# Altium PCB casio_final.PcbDoc
Units mil, origin at the board's own origin, x right, y up, seen from the top; angles counter-clockwise.
Board outline 3690 x 3925 mil, 2 copper layers (Top Layer, Bottom Layer); 46 components, 25 nets, 186 pads, 2 vias.
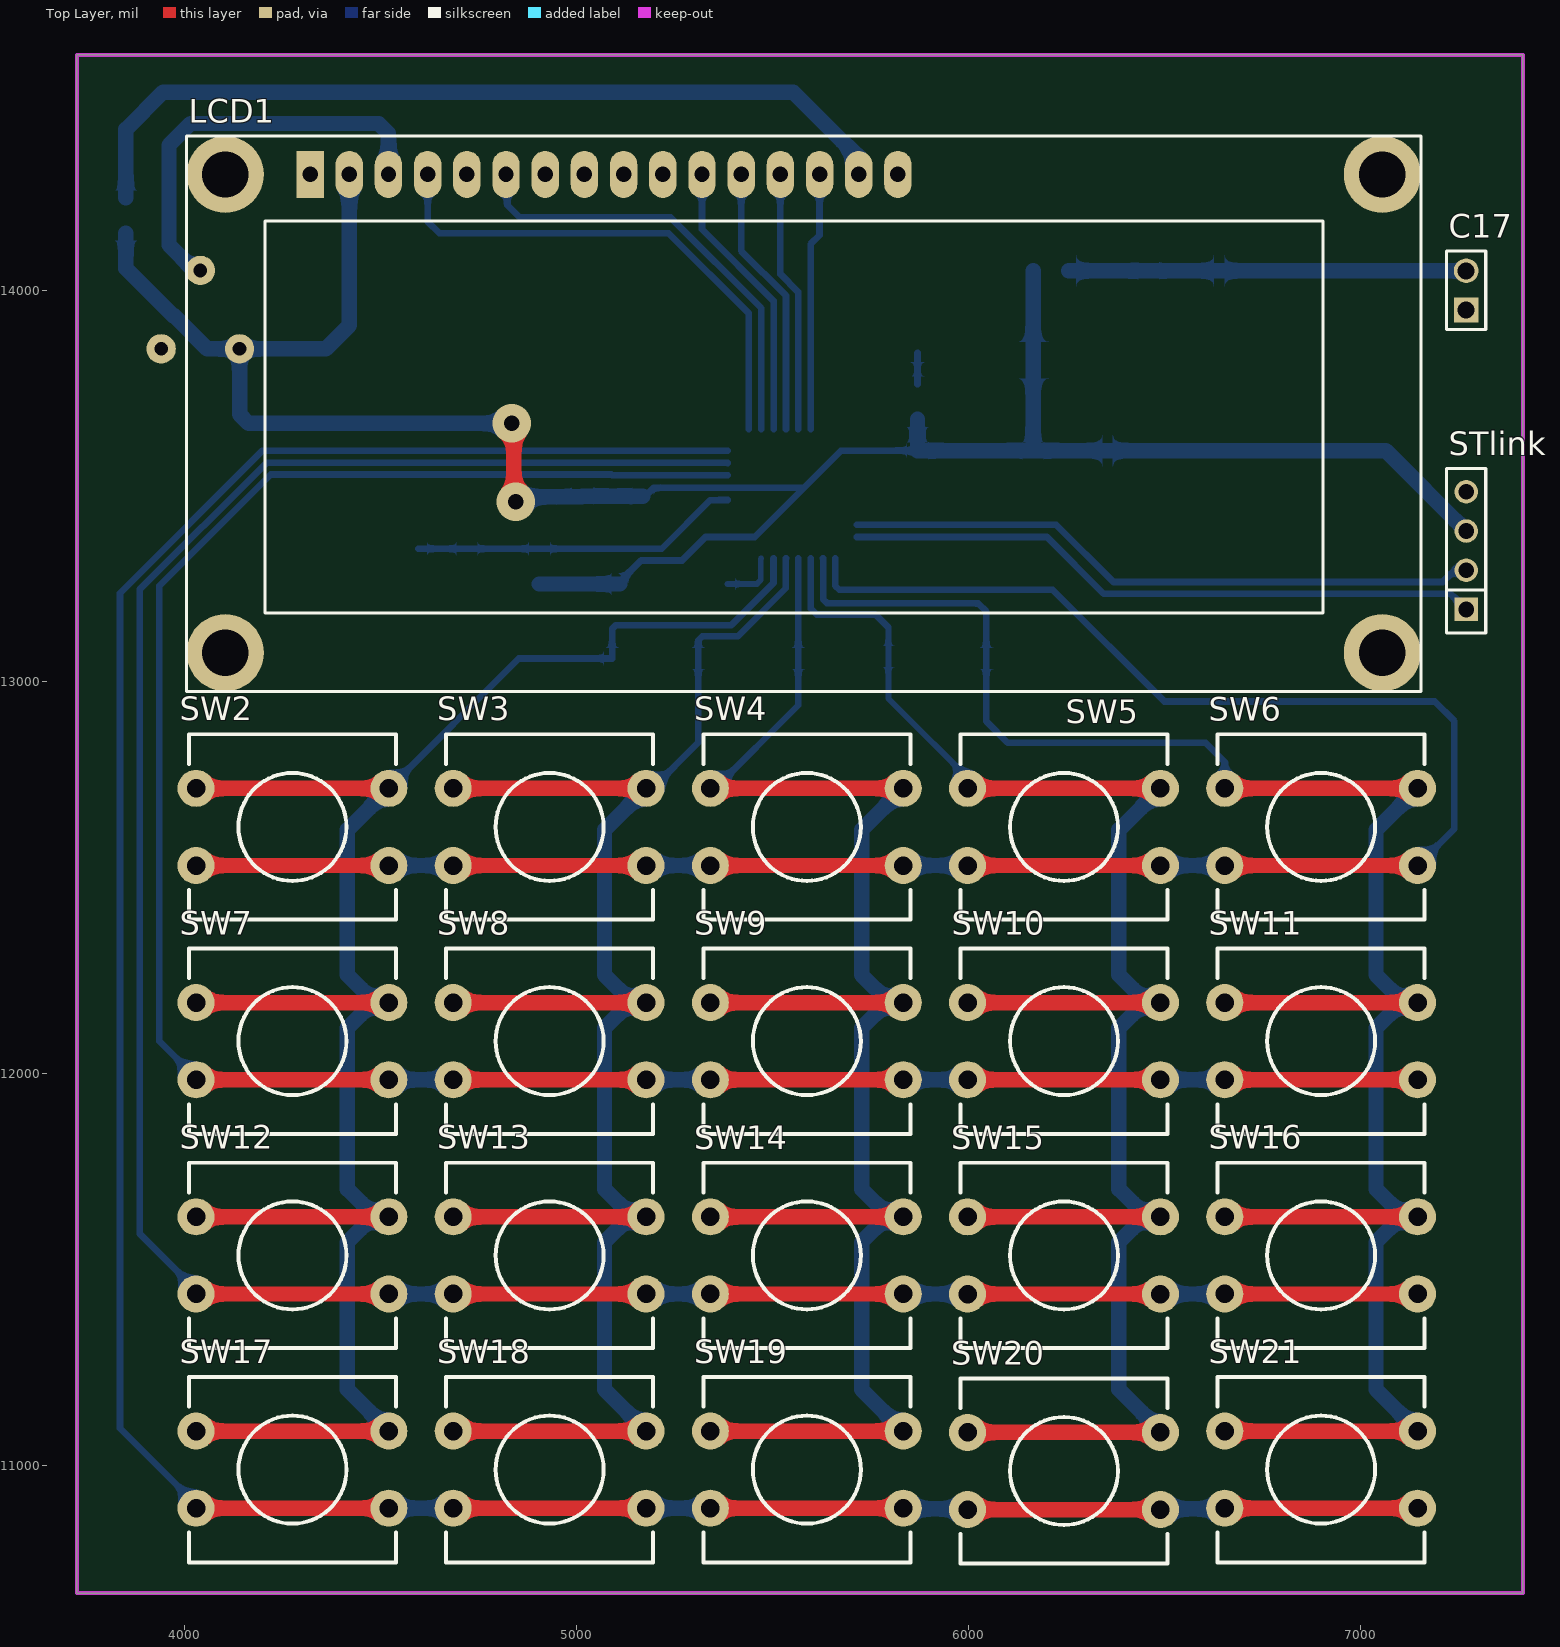
[diagram p0: Top Layer view]
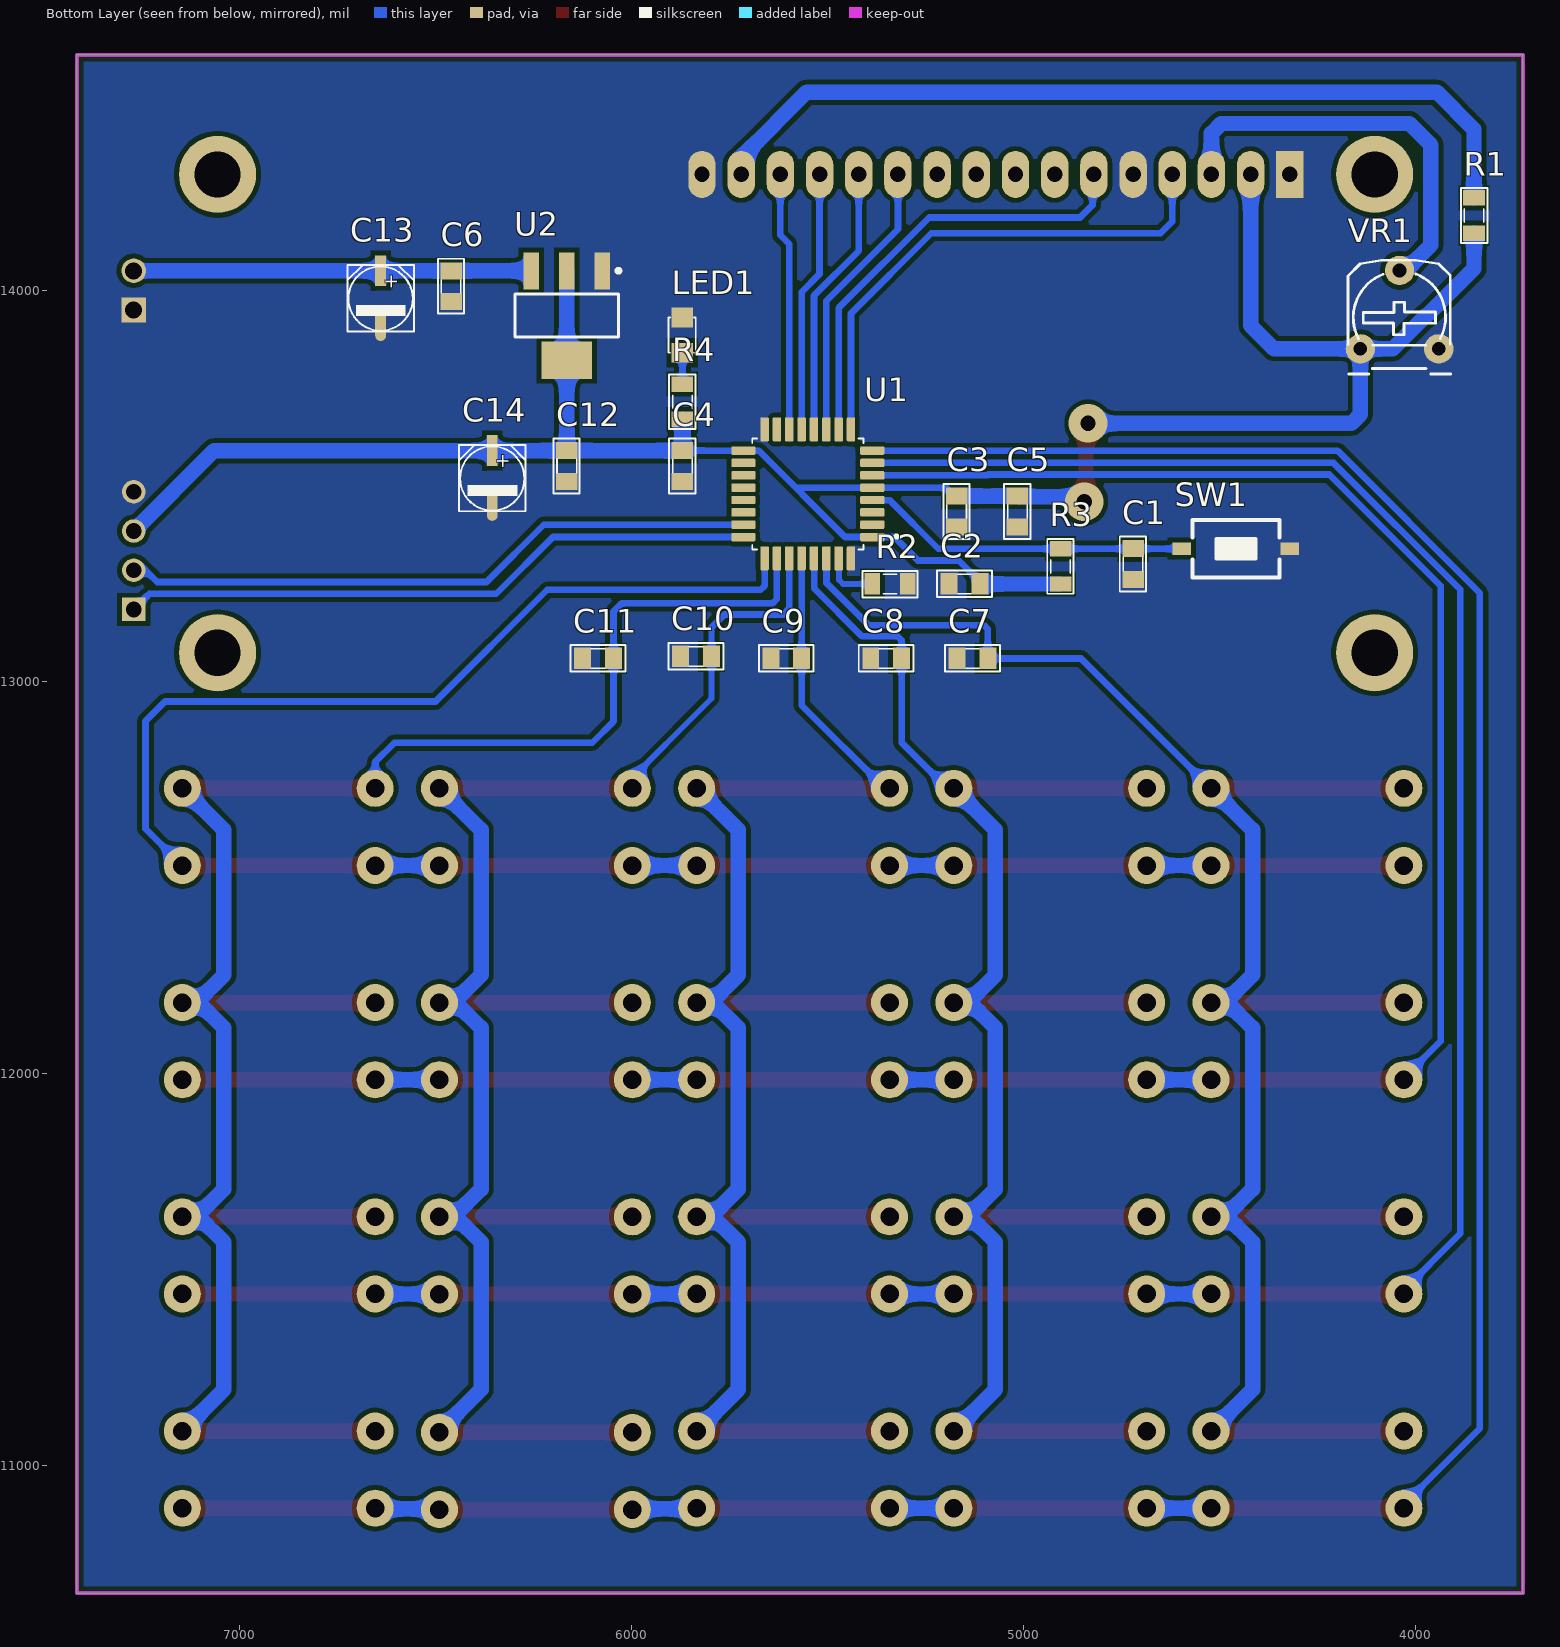
[diagram p1: Bottom Layer view, seen from below]
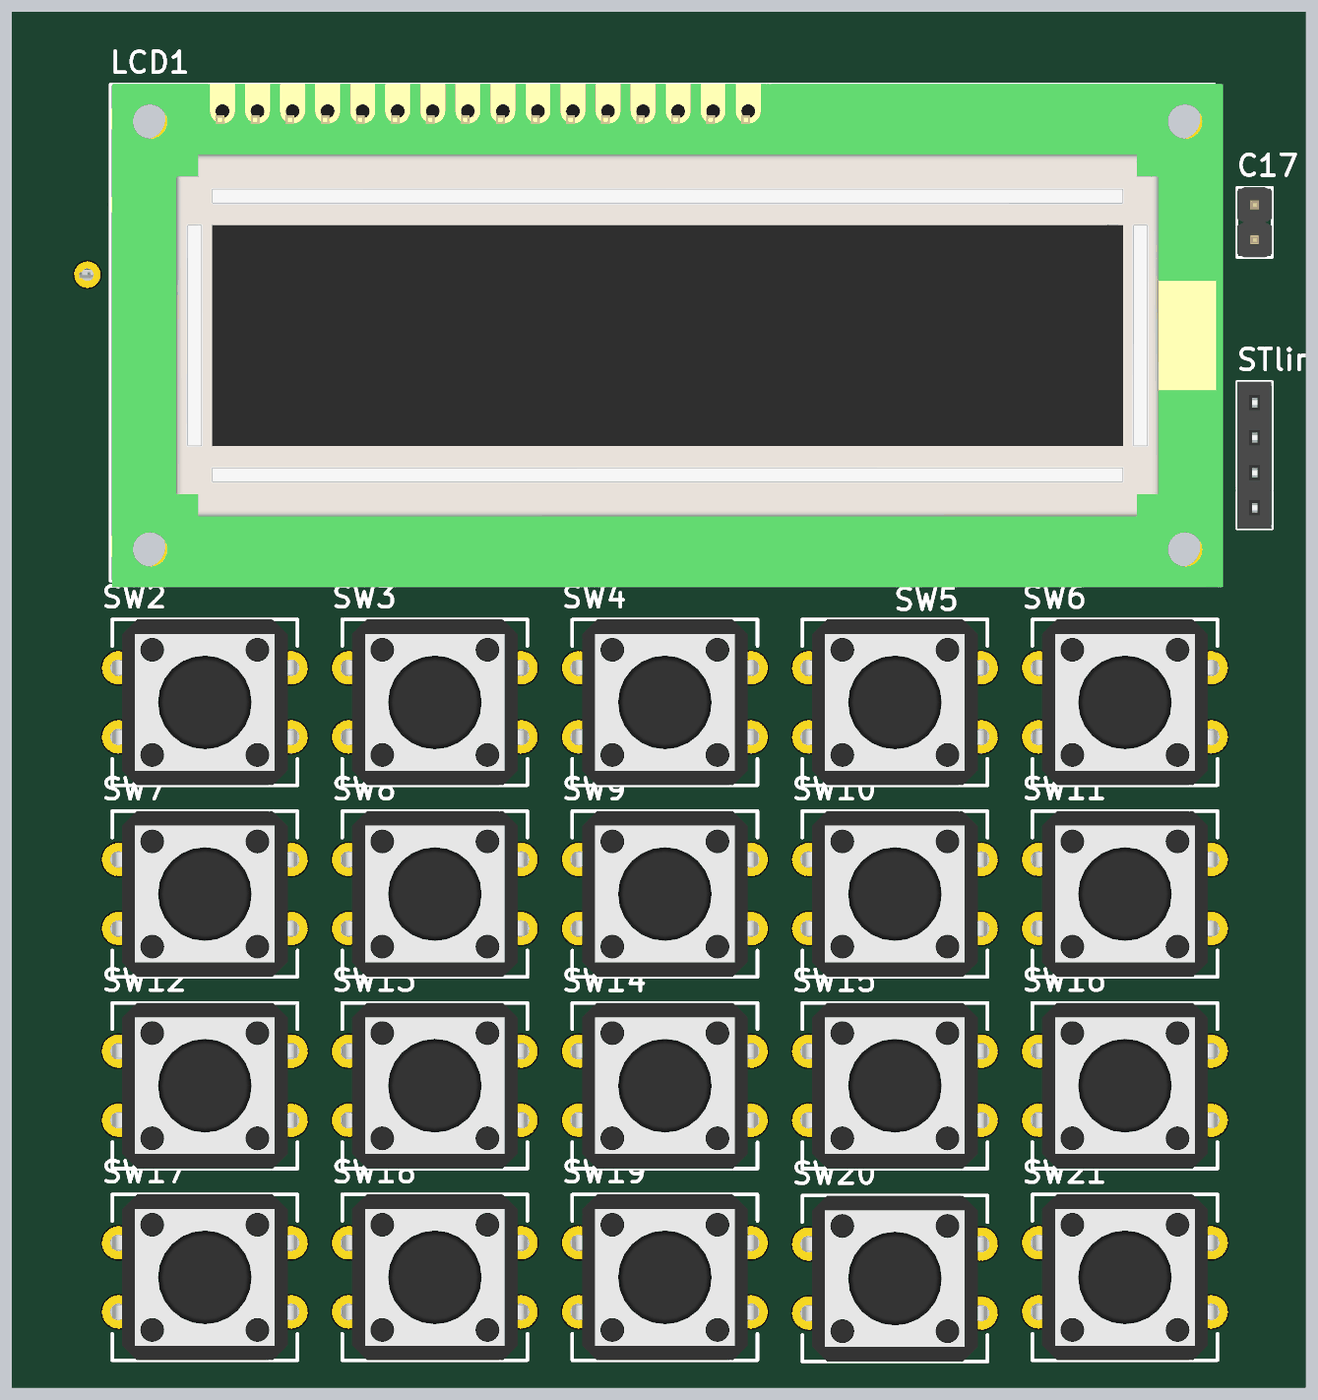
[diagram p2: 3D render of the assembled board from above, using the file's embedded part models]
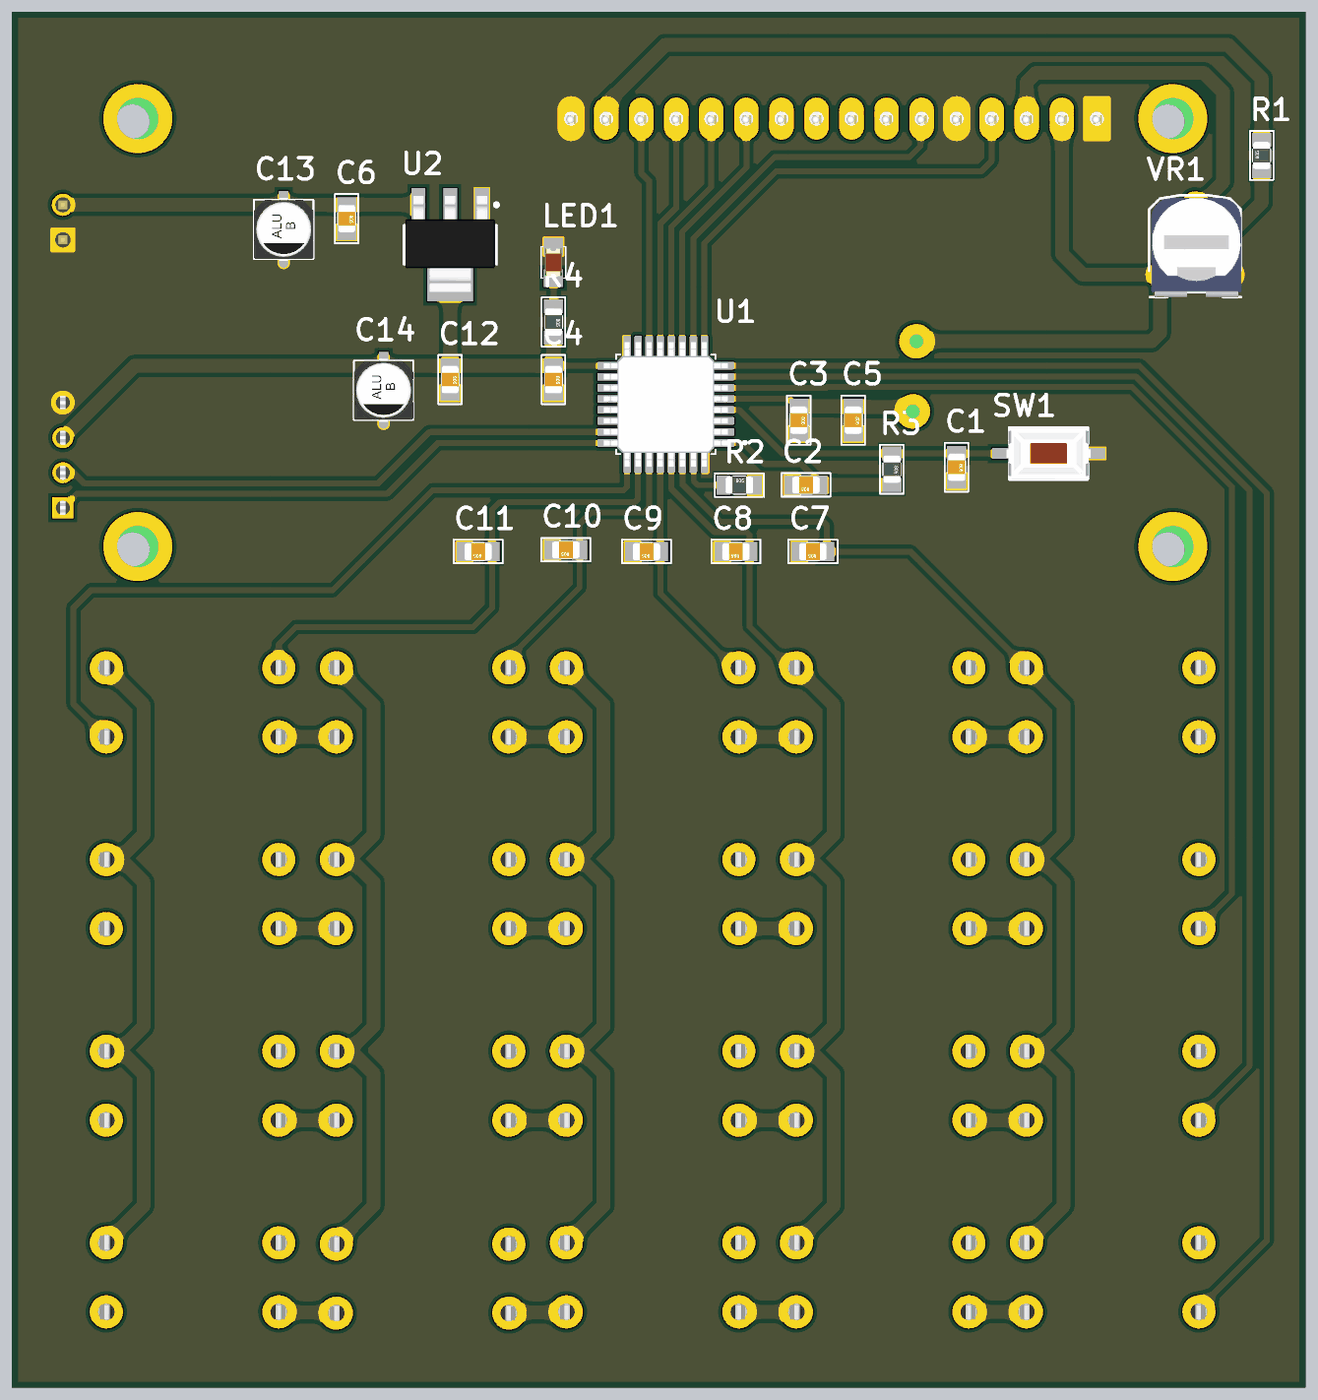
[diagram p3: 3D render of the assembled board from below, using the file's embedded part models]

## Layer stack, top to bottom
Top Solder: solder mask 0.4, Solder Resist, Dk 3.5
Top Layer: signal copper 1.4
Dielectric 1: dielectric 12.6, FR-4, Dk 4.8
Bottom Layer: signal copper 1.4
Bottom Solder: solder mask 0.4, Solder Resist, Dk 3.5

## Board outline
3725,10675 3725,14600 7415,14600 7415,10675

## Design rules (kind name [scope] priority, off if disabled: settings)
Clearance [All] p1: gap=11.81 ignorepadtopadclearanceinfootprint=TRUE
HoleSize [All] p1 off: absolutevalues=TRUE maxlimit=100 minlimit=1 maxpercent=80.000 minpercent=20.000
HoleToHoleClearance [All] p1 off: gap=10 allowstackedmicrovias=TRUE
LayerPairs [All] p1 off: enforce=TRUE
MinimumSolderMaskSliver [All] p1 off: minsoldermaskwidth=10
NetAntennae [All] p1 off: netantennaetolerance=0
PolygonConnect [All] p1: connectstyle=Direct reliefconductorwidth=10 reliefentries=4 polygonreliefangle="90 Angle" airgapwidth=10
RoutingVias [All] p1: holewidth=28 width=50 viastyle="Through Hole" minholewidth=28 minwidth=50 maxholewidth=28 maxwidth=50
SilkToSilkClearance [All] p1 off: silktosilkclearance=10
SilkToSolderMaskClearance [IsPad] p1 off: minsilkscreentomaskgap=10 clearancetoexposedcopper=TRUE
SolderMaskExpansion [All] p1: expansion=4 istentingtop=FALSE
SupplyNets "Schematic Supply Nets_2" [InNet('+6')] p1: voltage=0.000
SupplyNets "Schematic Supply Nets_1" [InNet('GND')] p2: voltage=0.000
SupplyNets "Schematic Supply Nets" [InNet('+3.3')] p3: voltage=0.000
Width [All] p1: maxlimit=100 minlimit=10 preferedwidth=15
23 further rules are at their usual default settings.

## Components (designator, comment, footprint, x,y, rotation, side; value= is the part's Value field where it differs from the comment)
C1 "0.1u" CN-SMD-0805 4720.01,13300.64 r270 bottom value=33pF
C2 "100n" CN-SMD-0805 5150,13250.01 r0 bottom value=33pF
C3 "0.1u" CN-SMD-0805 5170,13435 r270 bottom value=33pF
C4 "100n" CN-SMD-0805 5870,13550.87 r270 bottom value=33pF
C5 "4.7u" CN-SMD-0805 5015,13435 r270 bottom value=33pF
C6 "0.1u" CN-SMD-0805 6460,14009.81 r270 bottom value=33pF
C7 "0.1u" CN-SMD-0805 5130,13060 r0 bottom value=33pF
C8 "0.1u" CN-SMD-0805 5350,13060 r0 bottom value=33pF
C9 "0.1u" CN-SMD-0805 5605,13060 r0 bottom value=33pF
C10 "0.1u" CN-SMD-0805 5835,13065 r0 bottom value=33pF
C11 "0.1u" CN-SMD-0805 6085,13060 r0 bottom value=33pF
C12 "0.1u" CN-SMD-0805 6165.01,13550.87 r270 bottom value=33pF
C13 "10u" CAP-ALU-SMD-5.5x5.5 6640,13979.17 r270 bottom
C14 "10u" CAP-ALU-SMD-5.5x5.5 6355,13520.24 r270 bottom
C17 "JP2" JP2-D1T 7270,13949.17 r90 top
LCD1 "LCD 16x2A" LCD16X2 4320,14295 r0 top locked value=LCD16x2A
LED1 "LED" LED-0805-Red 5870.5,13840 r90 bottom value="LED 3 - 5 ly 2 Colour"
R1 "220" RES-SMD-0805 3850,14190 r90 bottom
R2 "10k" RES-SMD-0805 5340,13250 r180 bottom
R3 "10k" RES-SMD-0805 4905,13295 r270 bottom
R4 "1k" RES-SMD-0805 5870,13715 r270 bottom
STlink "JP4" JP4-C1T 7270,13185 r90 top
SW1 "SW" SW1-SMD 4457.8,13340 r0 bottom value="SW chip 2 pin"
SW2 "SW" SW1-DIP-12x12x8-Black 4275,12630 r180 top value="SW chip 2 pin"
SW3 "SW" SW1-DIP-12x12x8-Black 4931.25,12630 r180 top value="SW chip 2 pin"
SW4 "SW" SW1-DIP-12x12x8-Black 5587.5,12630 r180 top value="SW chip 2 pin"
SW5 "SW" SW1-DIP-12x12x8-Black 6243.75,12630 r180 top value="SW chip 2 pin"
SW6 "SW" SW1-DIP-12x12x8-Black 6900,12630 r180 top value="SW chip 2 pin"
SW7 "SW" SW1-DIP-12x12x8-Black 4275,12083.33 r180 top value="SW chip 2 pin"
SW8 "SW" SW1-DIP-12x12x8-Black 4931.25,12083.33 r180 top value="SW chip 2 pin"
SW9 "SW" SW1-DIP-12x12x8-Black 5587.5,12083.33 r180 top value="SW chip 2 pin"
SW10 "SW" SW1-DIP-12x12x8-Black 6243.75,12083.33 r180 top value="SW chip 2 pin"
SW11 "SW" SW1-DIP-12x12x8-Black 6900,12083.33 r180 top value="SW chip 2 pin"
SW12 "SW" SW1-DIP-12x12x8-Black 4275,11536.67 r180 top value="SW chip 2 pin"
SW13 "SW" SW1-DIP-12x12x8-Black 4931.25,11536.67 r180 top value="SW chip 2 pin"
SW14 "SW" SW1-DIP-12x12x8-Black 5587.5,11536.67 r180 top value="SW chip 2 pin"
SW15 "SW" SW1-DIP-12x12x8-Black 6243.75,11536.57 r180 top value="SW chip 2 pin"
SW16 "SW" SW1-DIP-12x12x8-Black 6900,11536.67 r180 top value="SW chip 2 pin"
SW17 "SW" SW1-DIP-12x12x8-Black 4275,10990 r180 top value="SW chip 2 pin"
SW18 "SW" SW1-DIP-12x12x8-Black 4931.25,10990 r180 top value="SW chip 2 pin"
SW19 "SW" SW1-DIP-12x12x8-Black 5587.5,10990 r180 top value="SW chip 2 pin"
SW20 "SW" SW1-DIP-12x12x8-Black 6243.75,10986.57 r180 top value="SW chip 2 pin"
SW21 "SW" SW1-DIP-12x12x8-Black 6900,10990 r180 top value="SW chip 2 pin"
U1 "STM32F030K6T6" QFP80P900X900X160-32N 5550,13480 r0 bottom
U2 "LM1117-3.3V" SOT223 6165,13935 r0 bottom
VR1 "10k" VR-S2 4140,13850 r180 bottom value="Volume 50k"

## Footprints (in the part's own frame and the unit in brackets; to place one, negate y for a bottom-side part, rotate by r counter-clockwise, add the part's x,y. Pads: shape width x height; smd on the part's side, far side on the other; paste and mask are expansions set on the pad)
CAP-ALU-SMD-5.5x5.5 [mm]
  rect 2x0.7 smd: 1(-1.778,0)
  oval 2x0.7 smd: 2(1.778,0)
  silkscreen extent -2.15,-2.15 2.15,2.15, body extent -2.3,-2.15 2.3,2.15, height 5.4
CN-SMD-0805 [mil]
  rect 43.31x55 smd: 1(-39.36,0.01) 2(39.37,0.01)
  silkscreen extent -70,-34 70,33, body extent -39,-25 39,25, height 31
JP2-D1T [mm] "2 pins, 1 row, straight, gold plating"
  rect 1.6x1.6 hole 1.1: 1(0,0)
  round 1.6 hole 1.1: 2(2.54,0)
  silkscreen extent -1.27,-1.27 3.81,1.27, body extent -1.27,-1.27 3.81,1.27, height 8.54
JP4-C1T [mm] "4 row, straight, gold plating"
  rect 1.52x1.52 hole 1.02: 1(0,0)
  round 1.52 hole 1.02: 2(2.54,0) 3(5.08,0) 4(7.62,0)
  silkscreen extent -1.52,-1.27 9.14,1.27, body extent -1.52,-1.25 9.14,1.25, height 8.51
LCD16X2 [mm] "LCD dipslay 16x2, 16 pin"
  rect 1.778x3.048 hole 1: 1(0,0)
  oval 1.778x3.048 hole 1: 2(2.54,0) 3(5.08,0) 4(7.62,0) 5(10.16,0) 6(12.7,0) 7(15.24,0) 8(17.78,0) 9(20.32,0) 10(22.86,0) 11(25.4,0) 12(27.94,0) 13(30.48,0) 14(33.02,0) 15(35.56,0) 16(38.1,0)
  round 5 hole 3: 17(-5.5,-31) 17(-5.5,0) 17(69.5,-31) 17(69.5,0)
  round 0 all layers, no hole: ""(-5.5,0)
  silkscreen extent -8,-33.5 72,2.5, body extent -7.87,-33.96 72.64,2.54, height 18.14
LED-0805-Red [mil]
  rect 50x55 smd: 1(0,0) 2(90,0)
  silkscreen extent 0,-35 90,35, body extent 5,-25 85,25, height 43
QFP80P900X900X160-32N [mm]
  rrect25% 1.56x0.55 smd: 1(-4.18,2.8) 2(-4.18,2) 3(-4.18,1.2) 4(-4.18,0.4) 5(-4.18,-0.4) 6(-4.18,-1.2) 7(-4.18,-2) 8(-4.18,-2.8) 17(4.18,-2.8) 18(4.18,-2) 19(4.18,-1.2) 20(4.18,-0.4) 21(4.18,0.4) 22(4.18,1.2) 23(4.18,2) 24(4.18,2.8)
  rrect25% 0.55x1.56 smd: 9(-2.8,-4.18) 10(-2,-4.18) 11(-1.2,-4.18) 12(-0.4,-4.18) 13(0.4,-4.18) 14(1.2,-4.18) 15(2,-4.18) 16(2.8,-4.18) 25(2.8,4.18) 26(2,4.18) 27(1.2,4.18) 28(0.4,4.18) 29(-0.4,4.18) 30(-1.2,4.18) 31(-2,4.18) 32(-2.8,4.18)
  silkscreen extent -5.84,-3.6 3.6,3.6, body extent -4.5,-4.5 4.5,4.5, height 1.73
RES-SMD-0805 [mil]
  rect 39.37x55 smd: 1(-45,0) 2(45,0)
  silkscreen extent -70,-34 70,33, body extent -39,-25 39,25, height 31
SOT223 [mm]
  rect 1x2.4 smd: 1(-2.3,-2.9) 2(0,-2.9) 3(2.3,-2.9)
  rect 3.3x2.4 smd: 4(0,2.9)
  silkscreen extent -3.47,-3.02 3.35,1.4, body extent -3.25,-3.56 3.25,3.4, height 1.68
SW1-DIP-12x12x8-Black [mm] "SW button 4pin, 12x12mm"
  round 2.4 hole 1.2: 1(-6.25,2.5) 1(6.25,2.5) 2(-6.25,-2.5) 2(6.25,-2.5)
  silkscreen extent -6.71,-6.01 6.71,6.01, body extent -6.71,-6.01 6.71,6.01, height 7.87
SW1-SMD [mm]
  rect 1.2x0.8 smd: 1(-3.5,0) 2(3.5,0)
  silkscreen extent -2.82,-1.85 2.82,1.85, body extent -3.05,-1.85 3.05,1.85, height 2.5
VR-S2 [mil] "Resistor Variable"
  round 75 hole 35: 1(0,0) 2(100,200) 3(200,0)
  silkscreen extent -31,-64 231,226, body extent -23,-64 232,219, height 299

## Part data
C1 C2 C3 C4 C5 C6 C7 C8 C9 C10 C11 C12: library part CN
C13 C14: library part CN-SMD, "Polarized Capacitor (Axial)", LatestRevisionDate=17-Jul-2002, LatestRevisionNote="Re-released for DXP Platform.", PackageReference=POLAR0.8, Published=8-Jun-2000, Publisher="Altium Limited"
C17: "WR-PHD 2.54 mm Angled Socket Header", Manufacturer="W¨¹rth Elektronik eiSos GmbH", partNo=613002143121, ComponentLink1 Description=Manufacturer, ComponentLink1URL=http://www.we-online.com, ComponentLink2 Description=Datasheet, ComponentLink2URL=http://katalog.we-online.de/em/datasheet/6130xx143121.pdf, Created by="Karrer Zheng", Created Date="29 March 2013", NoPins=02
LCD1: library part LCD16x2A, "LCD dipslay 16 char, 2 line"
LED1: library part "LED SMD"
R1 R2 R3 R4: library part Res-SMD, "Resistor", Manufacturer="Generic Components", Class=Passive, Published=08/06/2000, Publisher="Altium Hobart Technology Centre"
STlink: "WR-PHD 2.54 mm Angled Socket Header", Manufacturer="W¨¹rth Elektronik eiSos GmbH", partNo=613004143121, ComponentLink1 Description=Manufacturer, ComponentLink1URL=http://www.we-online.com, ComponentLink2 Description=Datasheet, ComponentLink2URL=http://katalog.we-online.de/em/datasheet/6130xx143121.pdf, Created by="Karrer Zheng", Created Date="29 March 2013", NoPins=04
SW1 SW2 SW3 SW4 SW5 SW6 SW7 SW8 SW9 SW10 SW11 SW12 SW13 SW14 SW15 SW16 SW17 SW18 SW19 SW20 SW21: library part SW2, "Switch button 2 pin"
U1: "ARMÂ® CortexÂ®-M0 STM32F0 Microcontroller IC 32-Bit Single-Core 48MHz 32KB (32K x 8) FLASH 32-LQFP (7x7)", Package="LQFP-32 STMicroelectronics", Check_prices=https://www.snapeda.com/parts/STM32F030K6T6/STMicroelectronics/view-part/?ref=eda, Digi-Key_Part_Number=497-14046-ND, MF=STMicroelectronics, MP=STM32F030K6T6, Purchase-URL=https://pricing.snapeda.com/search/part/STM32F030K6T6/?ref=eda, SnapEDA_Link=https://www.snapeda.com/parts/STM32F030K6T6/STMicroelectronics/view-part/?ref=snap
U2: library part LM1117, "800mA Low-Dropout Linear Regulator", Creator="Nguyen Ba Bien", Website=http://group3i.net
VR1: library part VR-S, "Var Resistor"

## Via types
v1: diameter 98.43, hole 39.37, Top Layer to Bottom Layer, 2 vias

## Nets (pads, with @x,y where several pads share a name; then routed paths per layer and width w, separated by ;. In a path a pad name is that pad's centre, name@x,y a point inside that pad or via, vN(x,y) a via of type N, cw(c..) or ccw(c..) an arc to the next point about the centre after c; other vN are vias at no path point)
+3.3: C2.1 C3.1 C4.1 C5.1 C12.1 C14.1 LCD1.2 R1.1 R3.2 R4.2 STlink.3 U1.1 U1.5 U1.17 U2.2 U2.4 VR1.1 | length 6112.8
  Top Layer w39.37: v1(4835,13660) 4840,13655 4840,13465 v1(4845,13460)
  Bottom Layer w17: C2.1 5110.64,13255.85 5164.79,13310 5269.23,13310 5328.99,13369.76 U1.1 5454.76,13369.76 5674.88,13589.88 5714.21,13589.88 U1.17 C4.1 ; C3.1 5175.84,13474.36 5197.22,13495.75 U1.5 5385.79,13495.39 5580,13495.39
  Bottom Layer w39.37: R1.1 3850,14055 3971,13934 3973.58,13934 4057.58,13850 VR1.1 ; LCD1.2 4420,13910 4360,13850 VR1.1 ; v1(4835,13660) 4163.06,13660 4140,13683.06 VR1.1 ; v1(4845,13460) 4860.98,13460 4873.38,13472.4 5013.03,13472.4 C5.1 C3.1@5169.37,13474.36 ; R3.2 C2.1 ; R4.2 C4.1 C12.1 ; U2.2 C12.1 ; STlink.3 7064.76,13590.24 C14.1 C12.1
+6: C6.1 C13.1 C17.2 U2.3 | length 1014.4
  Bottom Layer w39.37: U2.3 C6.1 C13.1 C17.2
D4: LCD1.11 U1.11 | length 726.1
  Bottom Layer w17: LCD1.11 5320,14155 5502.76,13972.24 U1.11
D5: LCD1.12 U1.12 | length 697.8
  Bottom Layer w17: LCD1.12 5420,14100 5534.25,13985.75 U1.12
D6: LCD1.13 U1.13 | length 669.4
  Bottom Layer w17: LCD1.13 5520,14040.74 5565.39,13995.36 5565.39,13644.93 U1.13
D7: LCD1.14 U1.14 | length 659.9
  Bottom Layer w17: U1.14 5597.24,14117.24 5620,14140 LCD1.14
EN: LCD1.6 U1.10 | length 1145.7
  Bottom Layer w17: LCD1.6 4823.28,14291.72 4823.28,14216.72 4855,14185 5240,14185 5471.26,13953.74 U1.10
GND: C1.2 C2.2 C3.2 C4.2 C5.2 C6.2 C7.2 C8.2 C9.2 C10.2 C11.2 C12.2 C13.2 C14.2 C17.1 LCD1.1 LCD1.5 LCD1.16 LED1.2 R2.2 STlink.4 SW1.1 U1.16 U1.32 U2.1 VR1.3
NetLCD1_3: LCD1.3 VR1.2 | length 1060.1
  Bottom Layer w39.37: VR1.2 4030.36,14050 4012.54,14067.81 4007.19,14067.81 3960,14115 3960,14370 4015,14425 4495,14425 4520,14400 LCD1.3
NetLCD1_15: LCD1.15 R1.2 | length 2196.4
  Bottom Layer w39.37: R1.2 3850,14410 3945,14505 5552.78,14505 5711.52,14346.27 5711.52,14303.48 LCD1.15
NetLED1_1: LED1.1 R4.1 | length 80.2
  Bottom Layer w17: R4.1 5870,13839.5 LED1.1
NetR2_1: R2.1 U1.31 | length 145.1
  Bottom Layer w15: R2.1 5460,13250 5469.9,13259.9 5469.9,13314.07 U1.31
NRST: C1.1 R3.1 SW1.2 U1.4 | length 840.7
  Bottom Layer w17: SW1.2 C1.1 R3.1@4904.36,13340 ; R3.1 5217.26,13340 5341.15,13463.89 5363.22,13463.89 5363.58,13464.25 U1.4
PA0: C7.1 SW2.2 SW7.2 SW12.2 SW17.2 U1.30 | length 5190.9
  Top Layer w39.37: SW2.2@4028.94,12728.42 SW2.2@4521.06,12728.42 ; SW7.2@4033.94,12181.76 SW7.2@4526.06,12181.76 ; SW17.2@4038.94,11088.43 SW17.2@4531.06,11088.43 ; SW12.2@4038.94,11635.09 SW12.2@4531.06,11635.09
  Bottom Layer w17: SW2.2@4521.06,12728.42 4852.63,13059.99 C7.1 5090.64,13135.08 5100.59,13145.04 5395.04,13145.04 5502.4,13252.4 5502.4,13315.07 U1.30
  Bottom Layer w39.37: SW12.2@4479.5,11635.09 4415,11570.59 4415,11194.49 SW17.2@4521.06,11088.43 ; SW7.2@4485.61,12181.76 4415,12252.37 4415,12622.36 SW2.2@4521.06,12728.42 ; SW12.2@4521.06,11635.09 4485.61,11635.09 4415,11705.7 4415,12117.26 4479.5,12181.76 SW7.2@4521.06,12181.76
PA1: C8.1 SW3.2 SW8.2 SW13.2 SW18.2 U1.29 | length 4696.6
  Top Layer w39.37: SW18.2@4685.19,11088.43 SW18.2@5177.31,11088.43 ; SW3.2@4685.19,12728.42 SW3.2@5177.31,12728.42 ; SW8.2@4698.94,12181.76 SW8.2@5191.06,12181.76 ; SW13.2@4710.19,11635.09 SW13.2@5202.31,11635.09
  Bottom Layer w17: SW3.2@5163.43,12728.42 5193.43,12728.42 5310.64,12845.64 C8.1 5310.64,13106.27 5320.59,13116.23 5411.23,13116.23 5533.89,13238.89 5533.89,13315.07 U1.29
  Bottom Layer w39.37: SW13.2@5135.75,11635.09 5071.25,11570.59 5071.25,11194.49 SW18.2@5177.31,11088.43 ; SW8.2@5141.86,12181.76 5071.25,12252.37 5071.25,12622.36 SW3.2@5177.31,12728.42 ; SW13.2@5177.31,11635.09 5141.86,11635.09 5071.25,11705.7 5071.25,12117.26 5135.75,12181.76 SW8.2@5177.31,12181.76
PA2: C9.1 SW4.2 SW9.2 SW14.2 SW19.2 U1.28 | length 4545.7
  Top Layer w39.37: SW19.2@5341.44,11088.43 SW19.2@5833.56,11088.43 ; SW4.2@5341.44,12728.42 SW4.2@5833.56,12728.42 ; SW9.2@5363.94,12181.76 SW9.2@5856.06,12181.76 ; SW14.2@5381.44,11635.09 SW14.2@5833.56,11635.09
  Bottom Layer w17: SW4.2@5341.44,12728.42 5353.43,12728.42 5565.64,12940.64 C9.1 ; C9.1@5565.75,13059.99 U1.28 ; SW14.2@5860.09,11635.09 SW14.2@5873.56,11635.09
  Bottom Layer w39.37: SW14.2@5792,11635.09 5727.5,11570.59 5727.5,11194.49 SW19.2@5833.56,11088.43 ; SW9.2@5798.11,12181.76 5727.5,12252.37 5727.5,12622.36 SW4.2@5833.56,12728.42 ; SW14.2@5833.56,11635.09 5798.11,11635.09 5727.5,11705.7 5727.5,12117.26 5792,12181.76 SW9.2@5833.56,12181.76
PA3: C10.1 SW5.2 SW10.2 SW15.2 SW20.2 U1.27 | length 4737.4
  Top Layer w39.37: SW20.2@6025,11085 SW20.2@6517.13,11085 ; SW15.2@6025,11635 SW15.2@6517.13,11635 ; SW10.2@6025,12181.76 SW10.2@6517.13,12181.76 ; SW5.2@6025,12728.42 SW5.2@6517.13,12728.42
  Bottom Layer w15: 5795.64,13139.36 C10.1 5795.64,13044.36 5795.64,12957.79 SW5.2@6025,12728.42
  Bottom Layer w17: U1.27 5597.6,13315.07 5597.6,13187.4 5612.73,13172.27 5762.73,13172.27 5795.64,13139.36
  Bottom Layer w39.37: SW15.2@6448.25,11635.09 6383.75,11570.59 6383.75,11194.49 SW20.2@6489.81,11088.43 ; SW10.2@6454.36,12181.76 6383.75,12252.37 6383.75,12622.36 SW5.2@6489.81,12728.42 ; SW15.2@6489.81,11635.09 6454.36,11635.09 6383.75,11705.7 6383.75,12117.26 6448.25,12181.76 SW10.2@6489.81,12181.76
PA4: C11.1 SW6.2 SW11.2 SW16.2 SW21.2 U1.26 | length 5418.2
  Top Layer w39.37: SW21.2@6653.94,11088.43 SW21.2@7146.06,11088.43 ; SW16.2@6653.94,11635.09 SW16.2@7146.06,11635.09 ; SW11.2@6653.94,12181.76 SW11.2@7146.06,12181.76 ; SW6.2@6653.94,12728.43 SW6.2@7146.06,12728.43
  Bottom Layer w17: U1.26 5629.1,13315.07 5629.1,13211.04 5639.06,13201.08 6018.25,13201.08 6019.32,13200 6025,13200 6045.64,13179.36 C11.1 6045.64,12899.36 6100,12845 6605,12845 6653.94,12796.06 SW6.2@6653.94,12728.43
  Bottom Layer w39.37: SW16.2@7104.5,11635.09 7040,11570.59 7040,11194.49 SW21.2@7146.06,11088.43 ; SW11.2@7110.61,12181.76 7040,12252.37 7040,12622.36 SW6.2@7146.06,12728.42 ; SW16.2@7146.06,11635.09 7110.61,11635.09 7040,11705.7 7040,12117.26 7104.5,12181.76 SW11.2@7146.06,12181.76
PA5: SW2.1 SW3.1 SW4.1 SW5.1 SW6.1 U1.25 | length 5317.4
  Top Layer w39.37: SW2.1@4028.94,12531.57 SW2.1@4521.06,12531.57 ; SW3.1@4685.19,12531.57 SW3.1@5177.31,12531.57 ; SW4.1@5341.44,12531.57 SW4.1@5833.56,12531.57 ; SW5.1@6025,12531.57 SW5.1@6517.13,12531.57 ; SW6.1@6653.94,12531.57 SW6.1@7146.06,12531.57
  Bottom Layer w17: U1.25 5660.24,13245.19 5670.19,13235.24 6214.76,13235.24 6500,12950 7190,12950 7240,12900 7240,12625.51 SW6.1@7146.06,12531.57
  Bottom Layer w39.37: SW2.1@4521.06,12531.57 SW3.1@4685.19,12531.57 ; SW3.1@5177.31,12531.57 SW4.1@5341.44,12531.57 ; SW4.1@5833.56,12531.57 SW5.1@5997.69,12531.57 ; SW5.1@6489.81,12531.57 SW6.1@6653.94,12531.57
PA6: SW7.1 SW8.1 SW9.1 SW10.1 SW11.1 U1.6 | length 5918.9
  Top Layer w39.37: SW7.1@4033.94,11984.91 SW7.1@4521.06,11984.91 ; SW8.1@4698.94,11984.91 SW8.1@5177.31,11984.91 ; SW9.1@5363.94,11984.91 SW9.1@5833.56,11984.91 ; SW10.1@6025,11984.91 SW10.1@6489.81,11984.91 ; SW11.1@6653.94,11984.91 SW11.1@7146.06,11984.91
  Bottom Layer w17: SW7.1@4033.94,11984.91 3935,12083.84 3935,13245 4219.52,13529.52 5088.75,13529.52 5090.67,13527.6 5385.07,13527.6 U1.6
  Bottom Layer w39.37: SW7.1@4521.06,11984.91 SW8.1@4685.19,11984.91 ; SW8.1@5177.31,11984.91 SW9.1@5341.44,11984.91 ; SW9.1@5833.56,11984.91 SW10.1@5997.69,11984.91 ; SW10.1@6489.81,11984.91 SW11.1@6653.94,11984.91
PA7: SW12.1 SW13.1 SW14.1 SW15.1 SW16.1 U1.7 | length 6550.7
  Top Layer w39.37: SW12.1@4038.94,11438.24 SW12.1@4521.06,11438.24 ; SW13.1@4710.19,11438.24 SW13.1@5177.31,11438.24 ; SW14.1@5341.44,11438.24 SW14.1@5833.56,11438.24 ; SW15.1@6025,11438.15 SW15.1@6489.81,11438.15 ; SW16.1@6653.94,11438.24 SW16.1@7146.06,11438.24
  Bottom Layer w17: SW12.1@4038.94,11438.24 3885,11592.18 3885,13235.74 4208.35,13559.1 5385.07,13559.1 U1.7 ; SW14.1@5873.56,11438.24 SW14.1@5873.61,11438.2
  Bottom Layer w39.37: SW12.1@4521.06,11438.24 SW13.1@4685.19,11438.24 ; SW13.1@5177.31,11438.24 SW14.1@5341.44,11438.24 ; SW14.1@5833.56,11438.24 5833.61,11438.2 5997.64,11438.2 SW15.1@5997.69,11438.15 ; SW15.1@6489.81,11438.15 6489.86,11438.2 6653.89,11438.2 SW16.1@6653.94,11438.24
PA8: SW17.1 SW18.1 SW19.1 SW20.1 SW21.1 U1.8 | length 7203.1
  Top Layer w39.37: SW17.1@4038.94,10891.57 SW17.1@4521.06,10891.57 ; SW18.1@4685.19,10891.57 SW18.1@5177.31,10891.57 ; SW19.1@5341.44,10891.57 SW19.1@5833.56,10891.57 ; SW20.1@6025,10888.15 SW20.1@6489.81,10888.15 ; SW21.1@6653.94,10891.57 SW21.1@7146.06,10891.57
  Bottom Layer w17: SW17.1@4038.94,10891.57 3835,11095.51 3835,13226.49 4198.75,13590.24 U1.8
  Bottom Layer w39.37: SW17.1@4521.06,10891.57 SW18.1@4685.19,10891.57 ; SW18.1@5177.31,10891.57 SW19.1@5341.44,10891.57 ; SW19.1@5833.56,10891.57 5835.28,10889.86 5995.97,10889.86 SW20.1@5997.69,10888.15 ; SW20.1@6489.81,10888.15 6491.53,10889.86 6652.22,10889.86 SW21.1@6653.94,10891.57
RS: LCD1.4 U1.9 | length 1332.7
  Bottom Layer w17: LCD1.4 4620,14175 4650,14145 5235,14145 5439.76,13940.24 U1.9
SWCLK: STlink.1 U1.24 | length 1632
  Bottom Layer w17: U1.24 6200.24,13369.76 6345,13225 7230,13225 STlink.1
SWDIO: STlink.2 U1.23 | length 1619.7
  Bottom Layer w17: U1.23 6223.74,13401.26 6370,13255 7210,13255 STlink.2@7255,13300
pads on no net: LCD1. LCD1.7 LCD1.8 LCD1.9 LCD1.10 LCD1.17 U1.2 U1.3 U1.15 U1.18 U1.19 U1.20 U1.21 U1.22

## Polygon pours and split planes (outlines as drawn)
GND on Bottom Layer "GND_L02_P007" (solid, pour order 7): 3725,10675 3725,14600 7415,14600 7415,10675

## Keep-outs
Keep-Out Layer:
  the board outline again, w10

## Text inside footprints (layer, text, board x,y; h text height)
C13: Bottom Overlay "+" at 6627.2,14042.16 h35 r90
C14: Bottom Overlay "+" at 6342.2,13583.23 h35 r90